# Altium PCB DriverPrototype.PcbDoc
Units mm, origin at the board's own origin, x right, y up, seen from the top; angles counter-clockwise.
Board outline 84.45 x 37.46 mm, 2 copper layers (Top Layer, Bottom Layer); 25 components, 24 nets, 69 pads, 310 vias.
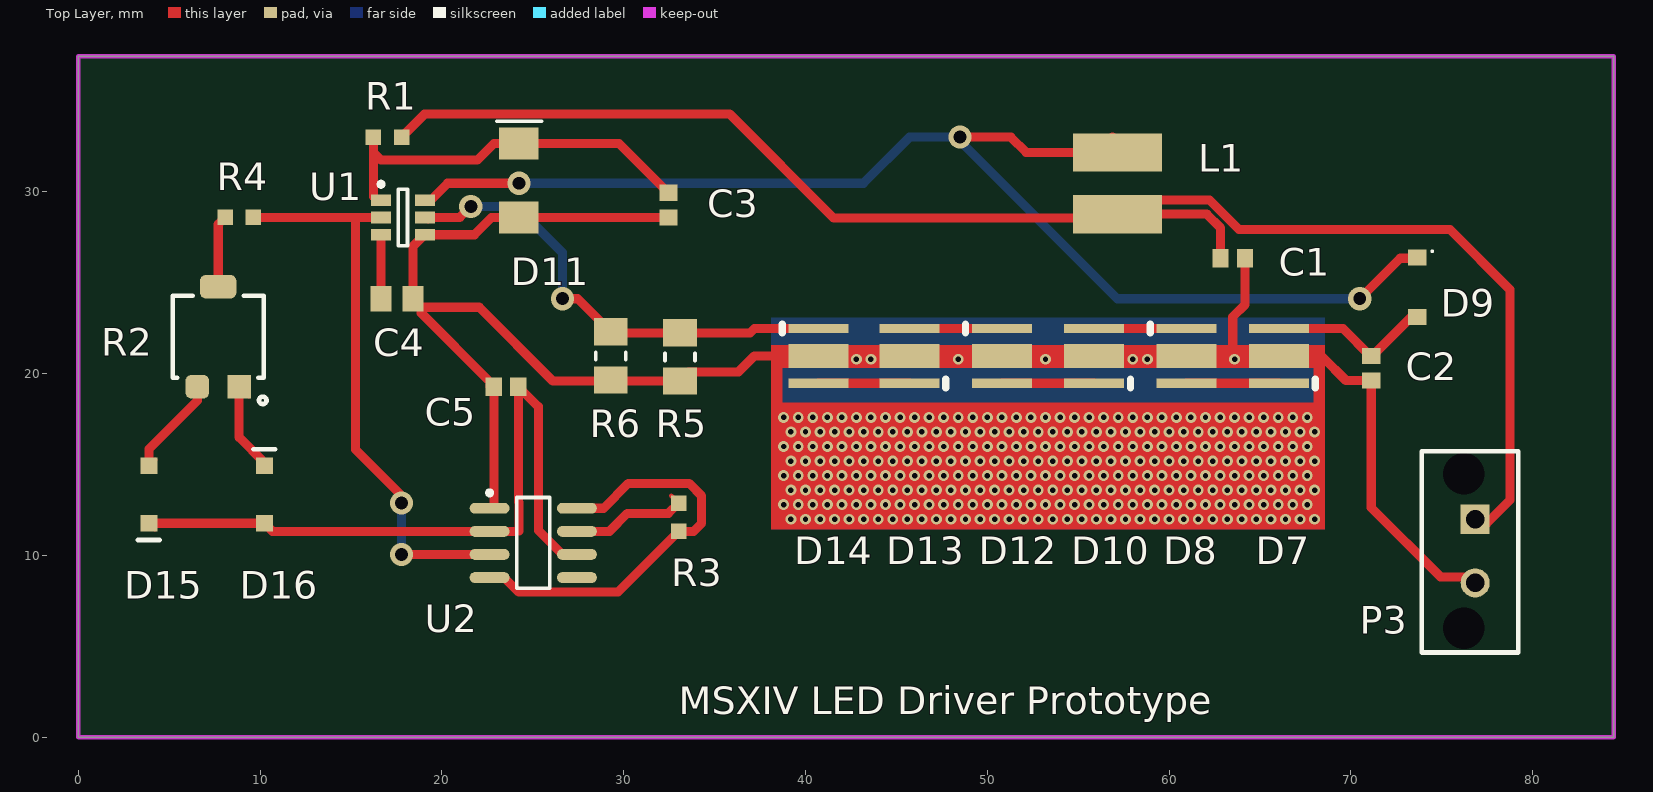
[diagram p0: Top Layer view]
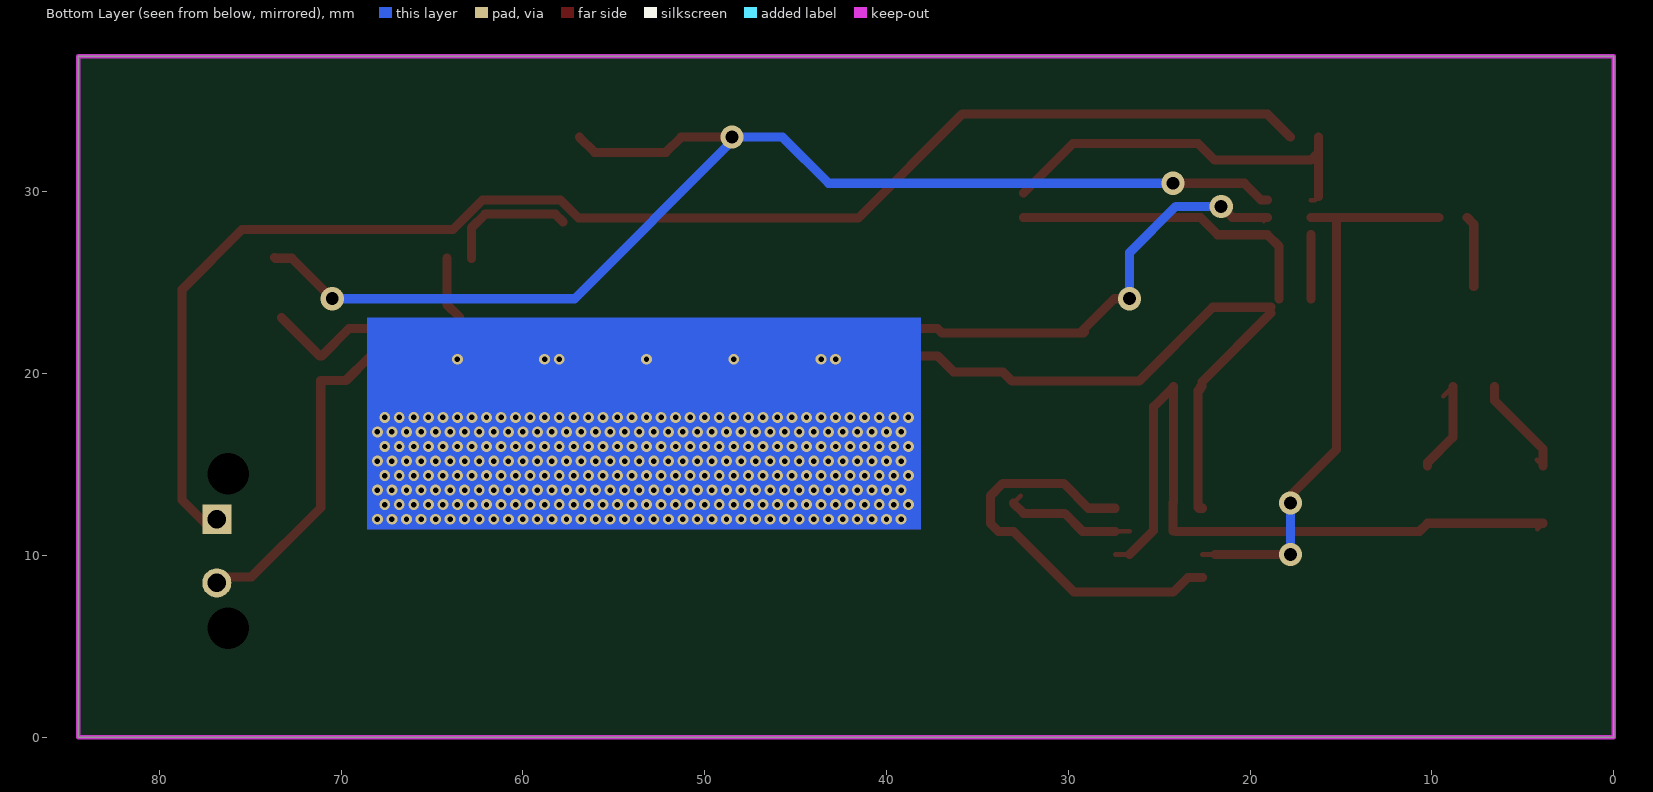
[diagram p1: Bottom Layer view, seen from below]
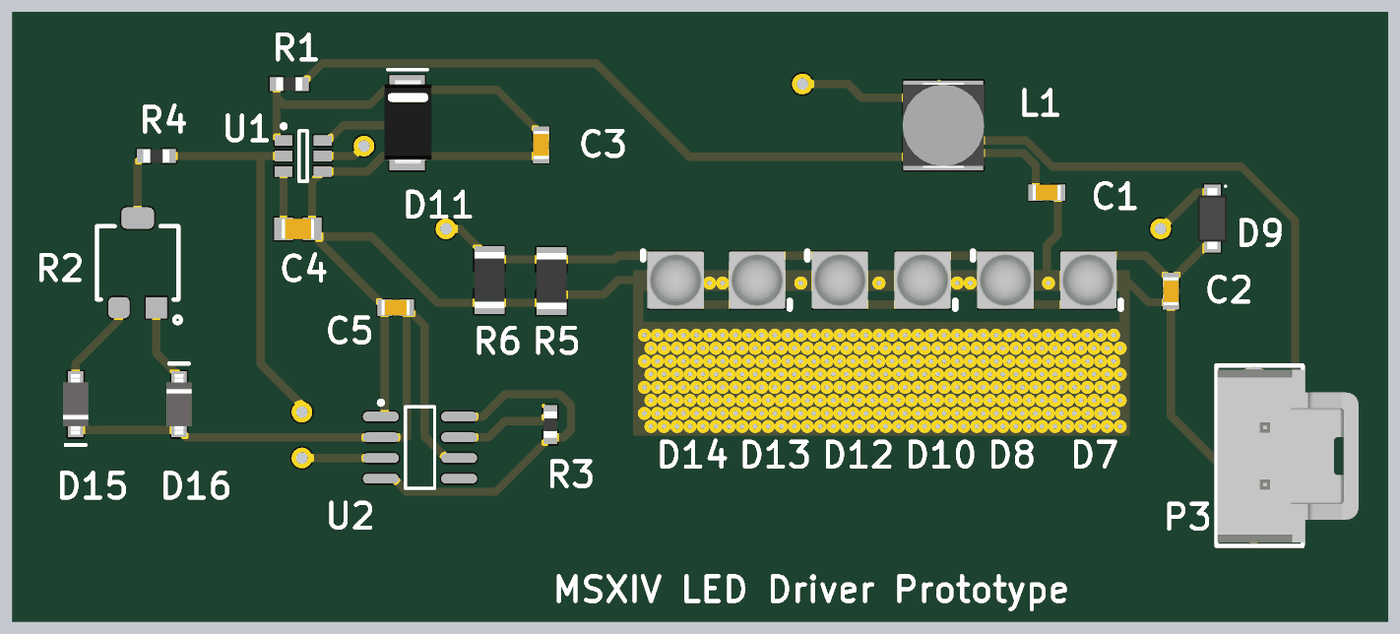
[diagram p2: 3D render of the assembled board from above, using the file's embedded part models]

## Layer stack, top to bottom
Top Solder: solder mask 0.0102, Solder Resist, Dk 3.5
Top Layer: signal copper 0.0356
Dielectric 1: dielectric 0.32, FR-4, Dk 4.8
Bottom Layer: signal copper 0.0356
Bottom Solder: solder mask 0.0102, Solder Resist, Dk 3.5

## Board outline
0,0 84.455,0 84.455,37.465 0,37.465

## Design rules (kind name [scope] priority, off if disabled: settings)
Clearance "Stitching GND" [IsStitchingVia and InNet('GND') vs (IsVia and (Not IsStitchingVia)) Or IsPad] p1: gap=0.1 ignorepadtopadclearanceinfootprint=FALSE
Clearance [All] p2: gap=0.254 ignorepadtopadclearanceinfootprint=FALSE except(0: Arc-Hole Track-Hole SMDPad-Hole THPad-Hole Via-Hole Fill-Hole Poly-Hole Region-Hole Text-Hole)
PolygonConnect [All] p1: connectstyle=Relief reliefconductorwidth=0.254 reliefentries=4 polygonreliefangle="90 Angle" airgapwidth=0.254
RoutingVias [InDrillLayerPair('Top Layer - Bottom Layer')] p1: holewidth=0.711 width=1.27 viastyle="Through Hole" minholewidth=0.711 minwidth=1.27 maxholewidth=0.711 maxwidth=1.27
SolderMaskExpansion [All] p1: expansion=0.102
Width [All] p1: maxlimit=0.5 minlimit=0.5 preferedwidth=0.5 minimp=50.000000 maximp=50.000000 favimp=50.000000
30 further rules are at their usual default settings.

## Components (designator, comment, footprint, x,y, rotation, side; value= is the part's Value field where it differs from the comment)
C1 "CAP CER 4.7UF 25V 10% X5R 0603" "CAP, 0603" 63.5,26.357 r0 top
C2 "CAP CER 1UF 50V 10% X7R 0603" "CAP, 0603" 71.12,20.305 r270 top
C3 "CAP CER 1UF 50V 10% X7R 0603" "CAP, 0603" 32.458,29.275 r270 top
C4 "CAP CER 0.22UF 50V X7R 0805" "CAP, 0805" 17.533,24.13 r0 top
C5 "CAP CER 0.1UF 50V 10% X7R 0603" "CAP, 0603" 23.533,19.29 r0 top
D7 "LED XLAMP COOL WHITE 5700K 2SMD" "LED CREE XP-E2 1414 2-SMD" 66.04,20.98 r270 top
D8 "LED XLAMP COOL WHITE 5700K 2SMD" "LED CREE XP-E2 1414 2-SMD" 60.96,20.98 r90 top
D9 "DIODE SCHOTTKY 40V 500MA SOD123" SOD123 73.66,24.765 r270 top
D10 "LED XLAMP COOL WHITE 5700K 2SMD" "LED CREE XP-E2 1414 2-SMD" 55.88,20.98 r270 top
D11 "DIODE ZENER 16V 5W DO-214AA (SMB)" "DO-214AA Diode" 24.23,28.6 r90 top
D12 "LED XLAMP COOL WHITE 5700K 2SMD" "LED CREE XP-E2 1414 2-SMD" 50.8,20.98 r90 top
D13 "LED XLAMP COOL WHITE 5700K 2SMD" "LED CREE XP-E2 1414 2-SMD" 45.72,20.98 r270 top
D14 "LED XLAMP COOL WHITE 5700K 2SMD" "LED CREE XP-E2 1414 2-SMD" 40.718,20.98 r90 top
D15 "DIODE GEN PURP 100V 300MA SOD123" "DIODE GEN PURP 100V 300MA SOD123" 3.888,13.36 r90 top
D16 "DIODE GEN PURP 100V 300MA SOD123" "DIODE GEN PURP 100V 300MA SOD123" 10.238,13.36 r270 top
L1 "FIXED IND 10UH 1.13A 237 MOHM" INDP5050X20N 57.15,30.48 r90 top
P3 "CONN 2POS ULTRA-FIT 0.138\"" "CONN, 2POS ULTRA-FIT" 76.835,12 r270 top
R1 "1K" "RES, 0603" 17.005,33.02 r180 top
R2 "POT 20k OHM 20% 1/4W" "20K POT" 7.698,24.79 r270 top value=20K
R3 "1K" "RES, 0603" 33.02,12.108 r90 top
R4 "RES 100 OHM 1% 1/10W 0603" "RES, 0603" 8.848,28.6 r0 top
R5 "RES SMD 1.15 OHM 1% 1/4W 1206" "RES 1206" 33.098,20.925 r270 top
R6 "RES SMD 1.15 OHM 1% 1/4W 1206" "RES 1206" 29.288,20.98 r270 top
U1 "IC LED DRIVER RGLTR DIM SOT23-6" SOT23-6_N 17.858,28.6 r0 top
U2 "IC OSC SGL TIMER 2.1MHZ 8-SOIC" SOIC8 25.02,10.668 r0 top

## Footprints (in the part's own frame and the unit in brackets; to place one, negate y for a bottom-side part, rotate by r counter-clockwise, add the part's x,y. Pads: shape width x height; smd on the part's side, far side on the other; paste and mask are expansions set on the pad)
"20K POT" [mm]
  rect 1.3x1.3 smd: 1(5.5,1.15)
  rrect50% 1.3x2 smd: 2(0,0)
  rrect50% 1.3x1.3 smd: 3(5.5,-1.15)
  silkscreen extent 0.5,-2.5 6.46,2.66
"CAP, 0603" [mm] "Chip Capacitor, 2-Leads, Body 1.60x0.81mm, IPC Medium Density"
  rect 0.9x1 smd mask+0.076: 1(-0.675,0) 2(0.675,0)
  body extent -0.87,-0.48 0.87,0.48, height 0.9
"CAP, 0805" [mm] "Chip Capacitor, 2-Leads, Body 2.00x1.25mm, IPC Medium Density"
  rect 1.15x1.4 smd: 1(-0.875,0) 2(0.875,0)
  body extent -1,-0.63 1,0.63, height 1.25
"CONN, 2POS ULTRA-FIT" [mm] "2 Positions Header, Shrouded Connector 0.138\" (3.50mm) Through Hole Gold"
  rect 1.6x1.6 hole 1.02: 1(0,0)
  round 1.6 hole 1.02: 2(3.5,0)
  round 1.6 hole 2.3: ""(-2.5,-0.63) ""(6,-0.63)
  silkscreen extent -3.74,-2.93 7.33,2.37, body extent -3.48,-2.87 7.12,5.79, height 13.85
"DIODE GEN PURP 100V 300MA SOD123" [mm] "Diode Standard 100V 300mA (DC) Surface Mount SOD-123"
  rect 0.9x0.95 smd: 1(1.58,0) 2(-1.58,0)
  silkscreen extent -2.5,-0.6 -2.5,0.6, body extent -1.85,-0.77 1.85,0.78, height 1.23
"DO-214AA Diode" [mil] "Zener Diode 16V 5W SMBJ5353B-TP"
  rect 70x85 smd: 1(0,0) 2(160,0)
  silkscreen extent 209,-50 209,47, body extent -21,-60 187,55, height 95
INDP5050X20N [mm] "Precision Wire Wound Inductor, 2-Leads, Body 5.00x5.00mm, IPC Medium Density"
  rect 2.1x4.9 smd: 1(-1.7,0) 2(1.7,0)
  body extent -2.6,-2.5 2.6,2.5, height 2.1
"LED CREE XP-E2 1414 2-SMD" [mm]
  rect 0.5x3.3 smd: 1(-1.5,0) 3(1.5,0)
  rect 1.3x3.3 smd: 2(0,0)
  silkscreen extent 1.27,2 1.75,2, body extent -1.73,-1.73 1.73,1.73, height 2.28
"RES 1206" [mm] "Chip Resistor, 2-Leads, Body 3.20x1.60mm, IPC Medium Density"
  rect 1.5x1.85 smd: 1(-1.325,0) 2(1.325,0)
  silkscreen extent -0.2,-0.82 0.2,0.82, body extent -1.73,-0.92 1.73,0.92, height 0.64
"RES, 0603" [mm] "Chip Resistor, 2-Leads, Body 1.60x0.80mm, IPC Medium Density"
  rect 0.85x0.85 smd: 1(-0.775,0) 2(0.775,0)
  body extent -0.8,-0.4 0.8,0.4, height 0.55
SOD123 [mm] "SODFL, 2-Leads, Body 1.60x3.75mm, IPC Medium Density"
  rect 0.88x1.02 smd: 1(-1.635,0) 2(1.635,0)
  silkscreen extent -2.02,0.76 -1.93,0.86, body extent -1.88,-0.9 1.88,0.9, height 1.28
SOIC8 [mm]
  oval 2.2x0.6 smd: 1(-2.394,1.935) 2(-2.394,0.665) 3(-2.394,-0.605) 4(-2.394,-1.875) 5(2.406,-1.875) 6(2.406,-0.605) 7(2.406,0.665) 8(2.406,1.935)
  silkscreen extent -2.52,-2.47 0.91,2.91, body extent -1.99,-2.47 2.01,2.53, height 1.75
SOT23-6_N [mm] "SOT23, 6-Leads, Body 2.9x1.6mm, Pitch 0.95mm, Lead Span 2.7mm, IPC Medium Density"
  rect 1.1x0.65 smd: 1(-1.2,0.95) 2(-1.2,0) 3(-1.2,-0.95) 4(1.2,-0.95) 5(1.2,0) 6(1.2,0.95)
  silkscreen extent -1.32,-1.55 0.25,1.95, body extent -0.9,-1.55 0.9,1.55, height 1.45

## Part data
C1: "4.7µF ?0% 25V Ceramic Capacitor X5R 0603 (1608 Metric)", Capacitance=4.7µF, Manufacturer 1="Murata Electronics North America", Manufacturer Part Number 1=GRM188R61E475KE11D, Operating Temperature="-55°C ~ 85°C", Package / Case="0603 (1608 Metric)", Ratings=-, Supplier Part Number 1=490-7203-1-ND, Temperature Coefficient=X5R, Tolerance=?0%, Voltage=25V, ComponentLink1Description=http://www.murata.com/~/media/webrenewal/support/library/catalog/products/capacitor/mlcc/c02e.ashx, ComponentLink1URL=http://www.murata.com/~/media/webrenewal/support/library/catalog/products/capacitor/mlcc/c02e.ashx, Height - Seated (Max)=-, Lead Spacing=-, Lead Style=-, Mounting Type="Surface Mount, MLCC", Packaging="Cut Tape (CT)", Part Status=Active, Size / Dimension="0.063\" L x 0.031\" W (1.60mm x 0.80mm)", Supplier 1=Digi-Key, Thickness (Max)="0.031\" (0.80mm)"
C2 C3: "1µF ?0% 50V Ceramic Capacitor X7R 0603 (1608 Metric)", Capacitance=1µF, Manufacturer 1="Taiyo Yuden", Manufacturer Part Number 1=UMK107AB7105KA-T, Operating Temperature="-55°C ~ 125°C", Package / Case="0603 (1608 Metric)", Ratings=-, Supplier Part Number 1=587-3247-1-ND, Temperature Coefficient=X7R, Tolerance=?0%, Voltage=50V, ComponentLink1Description=http://www.yuden.co.jp/productdata/catalog/en/mlcc_all_e.pdf, ComponentLink1URL=http://www.yuden.co.jp/productdata/catalog/en/mlcc_all_e.pdf, Height - Seated (Max)=-, Lead Spacing=-, Lead Style=-, Mounting Type="Surface Mount, MLCC", Packaging="Cut Tape (CT)", Part Status=Active, Size / Dimension="0.063\" L x 0.031\" W (1.60mm x 0.80mm)", Supplier 1=Digi-Key, Thickness (Max)="0.037\" (0.95mm)"
C4: Capacitance=220nF, Case/Package=0805, Case Code (Metric)=2012, Dielectric=X7R, Manufacturer=Samsung, Manufacturer Part Number=CL21B224KBFNNNE, Max Operating Temperature=125°C, Min Operating Temperature=-55°C, Package Quantity=1, Supplier Part Number 1=1276-1093-6-ND, Tolerance=10%, Voltage=50V, Case Code (Imperial)=0805, ComponentLink1Description=https://www.verical.com/server-webapp/html/getDatasheet?partID=358363&src-supplier=Verical, ComponentLink1URL=https://www.verical.com/server-webapp/html/getDatasheet?partID=358363&src-supplier=Verical, Contact Plating=Tin, Depth=1.25mm, Height=1.25mm, Lead Free="Lead Free", Length=2mm, Mount="Surface Mount", Packaging="Tape and Reel", Pricing 1="1=0.11, 10=0.077, 100=0.0361, 500=0.02532, 1000=0.02096 (USD)", Radiation Hardening=No, Stock 1=219478, Supplier 1=Digi-Key, Thickness=0.053inch, Voltage Rating=50V, Voltage Rating (DC)=50V, Width=0.049inch
C5: "0.10µF ?0% 50V Ceramic Capacitor X7R 0603 (1608 Metric)", Capacitance=0.1µF, Manufacturer 1="AVX Corporation", Manufacturer Part Number 1=06035C104KAT2A, Operating Temperature="-55°C ~ 125°C", Package / Case="0603 (1608 Metric)", Ratings=-, Supplier Part Number 1=478-5052-1-ND, Temperature Coefficient=X7R, Tolerance=?0%, Voltage=50V, ComponentLink1Description=http://datasheets.avx.com/X7RDielectric.pdf, ComponentLink1URL=http://datasheets.avx.com/X7RDielectric.pdf, Height - Seated (Max)=-, Lead Spacing=-, Lead Style=-, Mounting Type="Surface Mount, MLCC", Packaging="Cut Tape (CT)", Part Status=Active, Size / Dimension="0.063\" L x 0.032\" W (1.60mm x 0.81mm)", Supplier 1=Digi-Key, Thickness (Max)="0.035\" (0.90mm)"
D7 D8 D10 D13 D14: "LED Lighting XLamp?XP-E2 White, Cool 5700K 2.9V 350mA 110?1414 (3535 Metric)", Case/Package=SMD/SMT, Color=White, Correlated Color Temperature (CCT)=5700K, Forward Voltage=2.8V, Manufacturer=Cree, Manufacturer Part Number=XPGBWT-L1-0000-00JE2, Max Current Rating=1.5A, Supplier Part Number 1=XPGBWT-L1-0000-00JE2CT-ND, Test Current=350mA, Thermal Resistance of Package=4°C/W, ComponentLink1Description=http://www.mouser.com/ds/2/90/XLampXPE2-253473.pdf?src-supplier=Mouser, ComponentLink1URL=http://www.mouser.com/ds/2/90/XLampXPE2-253473.pdf?src-supplier=Mouser, ComponentLink2Description=http://www.cree.com/~/media/Files/Cree/LED%20Components%20and%20Modules/XLamp/Data%20and%20Binning/XLampXPE2.pdf?src-supplier=Digi-Key, ComponentLink2URL=http://www.cree.com/~/media/Files/Cree/LED%20Components%20and%20Modules/XLamp/Data%20and%20Binning/XLampXPE2.pdf?src-supplier=Digi-Key, ComponentLink3Description=https://www.verical.com/server-webapp/html/getDatasheet?partID=702662&src-supplier=Verical, ComponentLink3URL=https://www.verical.com/server-webapp/html/getDatasheet?partID=702662&src-supplier=Verical, Lead Free="Lead Free", Length=3.45mm, Mount="Surface Mount", Packaging="Tape and Reel", Pricing 1="1 = 1.47000, 10 = 1.40100, 100 = 1.25340, 250 = 1.13988, 500 = 1.06762 (USD)", RoHS=Yes, Stock 1=6024, Supplier 1=Digi-Key, Viewing Angle=115°, Width=3.45mm
D9: "Diode Schottky 40V 500mA Surface Mount SOD-123", Average Rectified Current=500mA, Current Rating=500A, Forward Voltage=620mV, Manufacturer="ON Semiconductor / Fairchild", Manufacturer Part Number=MBR0540, Max Forward Surge Current (Ifsm)=5.5A, Max Operating Temperature=125°C, Max Repetitive Reverse Voltage (Vrrm)=40V, Max Reverse Leakage Current=20uA, Min Operating Temperature=-65°C, Package Quantity=3000, Power Dissipation=400mW, Supplier Part Number 1=MBR0540DKR-ND, ComponentLink1Description=datasheet, ComponentLink1URL=https://www.onsemi.cn/PowerSolutions/document/MBR0540-D.pdf, ComponentLink2Description="supplier link", ComponentLink2URL=https://www.onsemi.com/PowerSolutions/product.do?id=MBR0540, ComponentLink3Description=https://www.fairchildsemi.com/datasheets/MB/MBR0540.pdf?src-supplier=Digi-Key, ComponentLink3URL=https://www.fairchildsemi.com/datasheets/MB/MBR0540.pdf?src-supplier=Digi-Key, ComponentLink4Description=https://www.onsemi.cn/PowerSolutions/document/MBR0540-D.pdf?src-supplier=Digi-Key, ComponentLink4URL=https://www.onsemi.cn/PowerSolutions/document/MBR0540-D.pdf?src-supplier=Digi-Key, ComponentLink5Description=http://www.jameco.com/Jameco/Products/ProdDS/975060.pdf?src-supplier=Jameco, ComponentLink5URL=http://www.jameco.com/Jameco/Products/ProdDS/975060.pdf?src-supplier=Jameco, ComponentLink6Description=http://www.mouser.com/ds/2/149/MBR0540-90522.pdf?src-supplier=Mouser, ComponentLink6URL=http://www.mouser.com/ds/2/149/MBR0540-90522.pdf?src-supplier=Mouser, ComponentLink7Description=https://www.verical.com/server-webapp/html/getDatasheet?partID=110131&src-supplier=Verical, ComponentLink7URL=https://www.verical.com/server-webapp/html/getDatasheet?partID=110131&src-supplier=Verical, ComponentLink8Description=http://www.farnell.com/datasheets/2041480.pdf?src-supplier=Element14, ComponentLink8URL=http://www.farnell.com/datasheets/2041480.pdf?src-supplier=Element14, ComponentLink9Description=https://www.fairchildsemi.com/datasheets/MB/MBR0540.pdf?src-supplier=Avnet, ComponentLink9URL=https://www.fairchildsemi.com/datasheets/MB/MBR0540.pdf?src-supplier=Avnet, Contact Plating=Tin,Matte, Element Configuration=Single, Forward Current=500mA, Height=1.03mm, Lead Free="Lead Free", Length=2.7mm, Max Reverse Voltage (DC)=40V, Max Surge Current=5.5A, Mount="Surface Mount", Number of Pins=2, Output Current=500mA, Packaging="Tape and Reel", Peak Non-Repetitive Surge Current=5.5A, Peak Reverse Current=20uA, Polarity=Standard, Pricing 1="1=0.2, 10=0.166, 100=0.0881, 500=0.05794, 1000=0.0394 (USD)", Radiation Hardening=No, REACH SVHC="No SVHC", Stock 1=414620, Supplier 1=Digi-Key, Voltage Rating (DC)=40V, Weight=0.03g, Width=1.6mm
D11: "Zener Diode 16V 5W ?% Surface Mount DO-214AA (SMB)", Manufacture="Micro Commercial Co", Manufacture Part Number=SMBJ5353B-TP, Power (Max)=5W, Supplier Part Number 1=SMBJ5353B-TPMSCT-ND, Voltage - Forward="1.2V @ 1A", Voltage - Zener (Nom)=16V, Impedence (Max)="2.5 Ohm", Supplier 1=Digi-Key
D12: "LED Lighting XLamp?XP-E2 White, Cool 5700K 2.9V 350mA 110?1414 (3535 Metric)", Case/Package=SMD/SMT, Color=White, Correlated Color Temperature (CCT)=5700K, Forward Voltage=2.9V, Manufacturer=Cree, Manufacturer Part Number=XPGBWT-L1-0000-00JE2, Max Current Rating=1.5A, Supplier Part Number 1=XPGBWT-L1-0000-00JE2CT-ND, Test Current=350mA, Thermal Resistance of Package=4°C/W, ComponentLink1Description=http://www.mouser.com/ds/2/90/XLampXPE2-253473.pdf?src-supplier=Mouser, ComponentLink1URL=http://www.mouser.com/ds/2/90/XLampXPE2-253473.pdf?src-supplier=Mouser, ComponentLink2Description=http://www.cree.com/~/media/Files/Cree/LED%20Components%20and%20Modules/XLamp/Data%20and%20Binning/XLampXPE2.pdf?src-supplier=Digi-Key, ComponentLink2URL=http://www.cree.com/~/media/Files/Cree/LED%20Components%20and%20Modules/XLamp/Data%20and%20Binning/XLampXPE2.pdf?src-supplier=Digi-Key, ComponentLink3Description=https://www.verical.com/server-webapp/html/getDatasheet?partID=702662&src-supplier=Verical, ComponentLink3URL=https://www.verical.com/server-webapp/html/getDatasheet?partID=702662&src-supplier=Verical, Lead Free="Lead Free", Length=3.45mm, Mount="Surface Mount", Packaging="Tape and Reel", Pricing 1="1 = 1.47000, 10 = 1.40100, 100 = 1.25340, 250 = 1.13988, 500 = 1.06762 (USD)", RoHS=Yes, Stock 1=6024, Supplier 1=Digi-Key, Viewing Angle=115°, Width=3.45mm
D15 D16: "Diode Standard 100V 300mA (DC) Surface Mount SOD-123", Case/Package=SOD-123-2, Forward Current=300mA, Forward Voltage=1.25V, Manufacturer="Diodes Zetex", Manufacturer Part Number=1N4148WQ-7-F, Max Operating Temperature=150°C, Max Power Dissipation=400mW, Max Repetitive Reverse Voltage (Vrrm)=100V, Max Surge Current=2A, Min Operating Temperature=-65°C, Package Quantity=3000, Peak Reverse Current=50uA, Supplier Part Number 1=1N4148WQ-7-FDICT-ND, ComponentLink1Description=http://components.arrow.com/part/dataview/0323_07206809, ComponentLink1URL=http://components.arrow.com/part/dataview/0323_07206809, ComponentLink2Description=http://www.diodes.com/datasheets/ds30086.pdf, ComponentLink2URL=http://www.diodes.com/datasheets/ds30086.pdf, ComponentLink3Description=http://www.mouser.com/ds/2/115/ds30086-318161.pdf, ComponentLink3URL=http://www.mouser.com/ds/2/115/ds30086-318161.pdf, Contact Plating=Tin,Matte, Element Configuration=Single, Lead Free="Lead Free", Mount="Surface Mount", Number of Pins=2, Packaging="Tape and Reel", Peak Non-Repetitive Surge Current=2A, Pricing 1="1=0.22, 10=0.196, 100=0.107, 500=0.0658, 1000=0.0449 (USD)", Recovery Time=4ns, Reverse Recovery Time=4ns, Stock 1=229, Supplier 1=Digi-Key, Weight=0.000353oz
L1: "10µH Shielded Wirewound Inductor 1.13A 237mOhm Max Nonstandard", Case/Package=2020, Current Rating=1.13A, DC Resistance (DCR)=237mR, Inductance=10uH, Inductance Tolerance=20%, Manufacturer=TDK, Manufacturer Part Number=VLCF5020T-100M1R1-1, Max Operating Temperature=105°C, Min Operating Temperature=-40°C, Package Quantity=500, RMS Current (Irms)=1.5A, Supplier Part Number 1=445-3209-2-ND, Test Frequency=100kHz, ComponentLink1Description=http://www.onlinecomponents.com/productFiles/mf-TDK/e531_vlcf5020_1.pdf?src-supplier=Onlinecomponents.com, ComponentLink1URL=http://www.onlinecomponents.com/productFiles/mf-TDK/e531_vlcf5020_1.pdf?src-supplier=Onlinecomponents.com, ComponentLink2Description=http://www.mouser.com/ds/2/400/e531_vlcf-18500.pdf?src-supplier=Mouser, ComponentLink2URL=http://www.mouser.com/ds/2/400/e531_vlcf-18500.pdf?src-supplier=Mouser, ComponentLink3Description=http://www.farnell.com/datasheets/516785.pdf?src-supplier=Element14, ComponentLink3URL=http://www.farnell.com/datasheets/516785.pdf?src-supplier=Element14, ComponentLink4Description=http://uk.rs-online.com/webdocs/1538/0900766b81538dbe.pdf?src-supplier=RSComponents, ComponentLink4URL=http://uk.rs-online.com/webdocs/1538/0900766b81538dbe.pdf?src-supplier=RSComponents, ComponentLink5Description=https://www.verical.com/server-webapp/html/getDatasheet?partID=107508&src-supplier=Verical, ComponentLink5URL=https://www.verical.com/server-webapp/html/getDatasheet?partID=107508&src-supplier=Verical, Composition=Wirewound, Core Material=Ferrite, DC Current=1.13A, Depth=5.2mm, Height=2mm, Height - Seated (Max)=0.079inch, Lead Free="Lead Free", Length=0.197inch, Max DC Current=1.13A, Military Standard=Not, Mount="Surface Mount", Number of Pins=2, Packaging="Tape and Reel", Pricing 1="500=0.441, 1000=0.357, 2500=0.336, 5000=0.3255, 12500=0.315, 25000=0.3045 (USD)", Radiation Hardening=No, REACH SVHC="No SVHC", Saturation Current=1.13A, Shielding=Shielded, Stock 1=12500, Supplier 1=Digi-Key, Termination=SMD/SMT, Tolerance=20%, Width=0.197inch
P3: "Connector Header Through Hole 2 position 0.138\" (3.50mm)", Color=Black, Manufacturer=Molex, Manufacturer Part Number=1722871102, Supplier Part Number 1=WM11701-ND, ComponentLink1Description=http://www.molex.com/pdm_docs/sd/1722861302_sd.pdf, ComponentLink1URL=http://www.molex.com/pdm_docs/sd/1722861302_sd.pdf, Connector Type="Male Pin", Contact Plating=Tin, Fastening Type=Latch, Mount="Through Hole", Number of Positions=2, Number of Rows=1, Packaging=Tray, Pitch=0.138inch, Pricing 1="1 = 0.78000, 10 = 0.68800, 100 = 0.59380, 500 = 0.48582, 1000 = 0.43184, 5000 = 0.37786, 10000 = 0.35897 (USD)", RoHS=Yes, Series=UltraFit, Stock 1=2743, Supplier 1=Digi-Key, Termination=Solder
R1 R3: library part "RES 1K OHM 5% 1/10W 0603", "1k Ohm ?% 0.1W, 1/10W Chip Resistor 0603 (1608 Metric)", Manufacturer=Yageo, Manufacturer Part Number=RC0603JR-071KL, Operating Temperature="-55°C ~ 155°C", Package / Case="0603 (1608 Metric)", Power (Watts)="0.1W, 1/10W", Resistance (Ohms)=1k, Supplier Device Package=0603, Supplier Part Number 1=311-1.0KGRCT-ND, Temperature Coefficient=?00ppm/°C, Tolerance=?%, Category=Resistors, ComponentLink1Description=http://www.yageo.com/documents/recent/PYu-RC_Group_51_RoHS_L_7.pdf, ComponentLink1URL=http://www.yageo.com/documents/recent/PYu-RC_Group_51_RoHS_L_7.pdf, Composition="Thick Film", Failure Rate=-, Features="Moisture Resistant", Height - Seated (Max)="0.022\" (0.55mm)", Packaging="Cut Tape (CT)", Part Status=Active, Pricing 1="1=0.15, 10=0.017, 100=0.0071, 1000=0.0032, 2500=0.00278 (CAD)", RoHS="RoHS Compliant", Size / Dimension="0.063\" L x 0.031\" W (1.60mm x 0.80mm)", Stock 1=4415240, Supplier 1=Digi-Key
R2: "20k Ohm 0.25W, 1/4W Gull Wing Surface Mount Trimmer Potentiometer", Manufacture="TT Electronics/BI", Manufacture Part Number=23BR20KLFTR, Power=1/4W, Supplier Part Number 1=987-1016-1-ND, Tolerence=20%, Adjustment Type=Top, Supplier 1=Digi-Key, Turns=1
R4: "100 Ohm ?% 0.1W, 1/10W Chip Resistor 0603 (1608 Metric) Moisture Resistant Thick Film", Manufacturer 1=Yageo, Manufacturer Part Number 1=RC0603FR-07100RL, Operating Temperature="-55°C ~ 155°C", Package / Case="0603 (1608 Metric)", Power=1/10W, Resistance=100, Supplier Device Package=0603, Supplier Part Number 1=311-100HRCT-ND, Temperature Coefficient=?00ppm/°C, Tolerance=?%, ComponentLink1Description=http://www.yageo.com/documents/recent/PYu-RC_Group_51_RoHS_L_7.pdf, ComponentLink1URL=http://www.yageo.com/documents/recent/PYu-RC_Group_51_RoHS_L_7.pdf, Composition="Thick Film", Failure Rate=-, Height - Seated (Max)="0.022\" (0.55mm)", Packaging="Cut Tape (CT)", Part Status=Active, Size / Dimension="0.063\" L x 0.031\" W (1.60mm x 0.80mm)", Supplier 1=Digi-Key
R5 R6: Case/Package=1206, Manufacturer=Yageo, Manufacturer Part Number=RC1206FR-071R15L, Max Operating Temperature=155°C, Min Operating Temperature=-55°C, Resistance=1.15R, Supplier Part Number 1=311-1.15FRDKR-ND, Temperature Coefficient=200ppm/°C, Tolerance=1%, Voltage Rating (DC)=200V, Composition="Thick Film", Contact Plating=Tin,Matte, Lead Free="Lead Free", Pricing 1="1=0.15, 10=0.133, 100=0.0512, 1000=0.02252, 2500=0.01945 (USD)", Radiation Hardening=No, Stock 1=34622, Supplier 1=Digi-Key
U1: "LED Driver IC 1 Output DC DC Regulator Step-Up (Boost) PWM Dimming 1.2A (Switch) SOT-23-6", Case/Package=SOT-23-6, Frequency=1.2MHz, Manufacturer="Texas Instruments", Manufacturer Part Number=TPS61165TDBVRQ1, Max Input Voltage=18V, Max Operating Temperature=105°C, Max Supply Current=2.3mA, Min Input Voltage=3V, Min Operating Temperature=-40°C, Output Current=1.2A, Output Voltage=38V, Package Quantity=3000, Quiescent Current=1.5mA, Supplier Part Number 1=TPS61165TDBVRQ1-ND, ComponentLink1Description=datasheet, ComponentLink1URL=http://www.ti.com/lit/ds/symlink/tps61165.pdf, ComponentLink2Description=http://www.ti.com/lit/gpn/tps61165-q1?src-supplier=Mouser, ComponentLink2URL=http://www.ti.com/lit/gpn/tps61165-q1?src-supplier=Mouser, ComponentLink3Description=https://www.verical.com/server-webapp/html/getDatasheet?partID=676299&src-supplier=Verical, ComponentLink3URL=https://www.verical.com/server-webapp/html/getDatasheet?partID=676299&src-supplier=Verical, ComponentLink4Description=http://www.ti.com/lit/ds/symlink/tps61165-q1.pdf?src-supplier=Digi-Key, ComponentLink4URL=http://www.ti.com/lit/ds/symlink/tps61165-q1.pdf?src-supplier=Digi-Key, Dimming=PWM, Lead Free="Lead Free", Max Supply Voltage=18V, Min Supply Voltage=3V, Number of Channels=1, Number of Outputs=1, Number of Pins=6, Number of Segments=3, Output Current per Channel=1.2A, Packaging="Tape and Reel", Radiation Hardening=No, Stock 1=0, Supplier 1=Digi-Key, Topology=Boost
U2: "555 Type, Timer/Oscillator (Single) IC 2.1MHz 8-SOIC", Case/Package=SOIC, Frequency=2.1MHz, High Level Output Current=-10mA, Low Level Output Current=100mA, Manufacturer="Texas Instruments", Manufacturer Part Number=TLC555QDRQ1, Max Operating Temperature=125°C, Max Power Dissipation=725mW, Max Supply Voltage=15V, Min Operating Temperature=-40°C, Min Supply Voltage=2V, Nominal Supply Current=170uA, Operating Supply Current=360uA, Package Quantity=2500, Supplier Part Number 1=296-22999-2-ND, ComponentLink1Description=http://focus.ti.com/lit/ds/symlink/tlc555-q1.pdf?src-supplier=Avnet, ComponentLink1URL=http://focus.ti.com/lit/ds/symlink/tlc555-q1.pdf?src-supplier=Avnet, ComponentLink2Description=http://www.farnell.com/datasheets/1806066.pdf?src-supplier=Element14, ComponentLink2URL=http://www.farnell.com/datasheets/1806066.pdf?src-supplier=Element14, ComponentLink3Description=https://www.verical.com/server-webapp/html/getDatasheet?partID=297376&src-supplier=Verical, ComponentLink3URL=https://www.verical.com/server-webapp/html/getDatasheet?partID=297376&src-supplier=Verical, ComponentLink4Description=http://www.ti.com/lit/ds/symlink/tlc555-q1.pdf?src-supplier=Digi-Key, ComponentLink4URL=http://www.ti.com/lit/ds/symlink/tlc555-q1.pdf?src-supplier=Digi-Key, Contact Plating=Gold, Lead Free="Lead Free", Mount="Surface Mount", Number of Pins=8, Number of Timers/Counters=1, Packaging="Tape and Reel", Power Dissipation=725mW, Pricing 1="2500=0.3528, 5000=0.33516, 12500=0.32256 (USD)", Quiescent Current=170uA, Radiation Hardening=No, REACH SVHC="No SVHC", Stock 1=60000, Supplier 1=Digi-Key, Weight=0.002561oz

## Via types
v1: diameter 0.6, hole 0.3, Top Layer to Bottom Layer, 303 vias
v2: diameter 1.27, hole 0.711, Top Layer to Bottom Layer, 7 vias

## Nets (pads, with @x,y where several pads share a name; then routed paths per layer and width w, separated by ;. In a path a pad name is that pad's centre, name@x,y a point inside that pad or via, vN(x,y) a via of type N, cw(c..) or ccw(c..) an arc to the next point about the centre after c; other vN are vias at no path point)
6V6: 
GND: C1.2 C2.2 C3.2 C4.2 C5.1 D7.2 D8.2 D10.2 D11.1 D12.2 D13.2 D14.2 P3.2 R5.2 R6.2 U1.4 U2.1 | length 106.1
  Top Layer w0.254: 18.856,23.342 C4.2@18.856,23.682 ; C5.1@22.626,19.059 22.758,19.19 C5.1 C5.1@22.858,19.34 ; R6.2 R6.2@29.343,19.6
  Top Layer w0.5: C4.2 18.408,27 U1.4 21.787,27.65 22.737,28.6 D11.1 C3.2 ; 18.856,23.342 22.658,19.54 22.658,19.29 22.758,19.19 22.858,19.09 22.858,12.649 22.811,12.603 U2.1 ; C4.2@18.856,23.682 18.88,23.658 22.056,23.658 26.113,19.6 29.343,19.6 R5.2 33.598,20.1 36.305,20.1 37.185,20.98 D14.2 D13.2 D12.2 D10.2 D8.2 v1@63.5,20.98 ; C1.2 64.175,23.805 63.5,23.13 v1@63.5,20.98 ; P3.2 76.51,8.825 74.93,8.825 71.12,12.635 C2.2 69.73,19.63 68.44,20.92 66.1,20.92 D7.2 v1@63.5,20.98
  other v1: 39.2,12 40,12 40.8,12 41.6,12 42.4,12 43.2,12 44,12 44.8,12 45.6,12 46.4,12 47.2,12 48,12 48.8,12 49.6,12 50.4,12 51.2,12 52,12 52.8,12 53.6,12 54.4,12 55.2,12 56,12 56.8,12 57.6,12 58.4,12 59.2,12 60,12 60.8,12 61.6,12 62.4,12 63.2,12 64,12 64.8,12 65.6,12 66.4,12 67.2,12 68,12 38.8,12.8 39.6,12.8 40.4,12.8 41.2,12.8 42,12.8 42.8,12.8 43.6,12.8 44.4,12.8 45.2,12.8 46,12.8 46.8,12.8 47.6,12.8 48.4,12.8 49.2,12.8 50,12.8 50.8,12.8 51.6,12.8 52.4,12.8 53.2,12.8 54,12.8 54.8,12.8 55.6,12.8 56.4,12.8 57.2,12.8 58,12.8 58.8,12.8 59.6,12.8 60.4,12.8 61.2,12.8 62,12.8 62.8,12.8 63.6,12.8 64.4,12.8 65.2,12.8 66,12.8 66.8,12.8 67.6,12.8 39.2,13.6 40,13.6 40.8,13.6 41.6,13.6 42.4,13.6 43.2,13.6 44,13.6 44.8,13.6 45.6,13.6 46.4,13.6 47.2,13.6 48,13.6 48.8,13.6 49.6,13.6 50.4,13.6 51.2,13.6 52,13.6 52.8,13.6 53.6,13.6 54.4,13.6 55.2,13.6 56,13.6 56.8,13.6 57.6,13.6 58.4,13.6 59.2,13.6 60,13.6 60.8,13.6 61.6,13.6 62.4,13.6 63.2,13.6 64,13.6 64.8,13.6 65.6,13.6 66.4,13.6 67.2,13.6 68,13.6 38.8,14.4 39.6,14.4 40.4,14.4 41.2,14.4 42,14.4 42.8,14.4 43.6,14.4 44.4,14.4 45.2,14.4 46,14.4 46.8,14.4 47.6,14.4 48.4,14.4 49.2,14.4 50,14.4 50.8,14.4 51.6,14.4 52.4,14.4 53.2,14.4 54,14.4 54.8,14.4 55.6,14.4 56.4,14.4 57.2,14.4 58,14.4 58.8,14.4 59.6,14.4 60.4,14.4 61.2,14.4 62,14.4 62.8,14.4 63.6,14.4 64.4,14.4 65.2,14.4 66,14.4 66.8,14.4 67.6,14.4 39.2,15.2 40,15.2 40.8,15.2 41.6,15.2 42.4,15.2 43.2,15.2 44,15.2 44.8,15.2 45.6,15.2 46.4,15.2 47.2,15.2 48,15.2 48.8,15.2 49.6,15.2 50.4,15.2 51.2,15.2 52,15.2 52.8,15.2 53.6,15.2 54.4,15.2 55.2,15.2 56,15.2 56.8,15.2 57.6,15.2 58.4,15.2 59.2,15.2 60,15.2 60.8,15.2 61.6,15.2 62.4,15.2 63.2,15.2 64,15.2 64.8,15.2 65.6,15.2 66.4,15.2 67.2,15.2 68,15.2 38.8,16 39.6,16 40.4,16 41.2,16 42,16 42.8,16 43.6,16 44.4,16 45.2,16 46,16 46.8,16 47.6,16 48.4,16 49.2,16 50,16 50.8,16 51.6,16 52.4,16 53.2,16 54,16 54.8,16 55.6,16 56.4,16 57.2,16 58,16 58.8,16 59.6,16 60.4,16 61.2,16 62,16 62.8,16 63.6,16 64.4,16 65.2,16 66,16 66.8,16 67.6,16 39.2,16.8 40,16.8 40.8,16.8 41.6,16.8 42.4,16.8 43.2,16.8 44,16.8 44.8,16.8 45.6,16.8 46.4,16.8 47.2,16.8 48,16.8 48.8,16.8 49.6,16.8 50.4,16.8 51.2,16.8 52,16.8 52.8,16.8 53.6,16.8 54.4,16.8 55.2,16.8 56,16.8 56.8,16.8 57.6,16.8 58.4,16.8 59.2,16.8 60,16.8 60.8,16.8 61.6,16.8 62.4,16.8 63.2,16.8 64,16.8 64.8,16.8 65.6,16.8 66.4,16.8 67.2,16.8 68,16.8 38.8,17.6 39.6,17.6 40.4,17.6 41.2,17.6 42,17.6 42.8,17.6 43.6,17.6 44.4,17.6 45.2,17.6 46,17.6 46.8,17.6 47.6,17.6 48.4,17.6 49.2,17.6 50,17.6 50.8,17.6 51.6,17.6 52.4,17.6 53.2,17.6 54,17.6 54.8,17.6 55.6,17.6 56.4,17.6 57.2,17.6 58,17.6 58.8,17.6 59.6,17.6 60.4,17.6 61.2,17.6 62,17.6 62.8,17.6 63.6,17.6 64.4,17.6 65.2,17.6 66,17.6 66.8,17.6 67.6,17.6 42.8,20.8 43.6,20.8 48.4,20.8 53.2,20.8 58,20.8 58.8,20.8 63.6,20.8
NetC2_1: C2.1 D7.1 D9.2 | length 8.7
  Top Layer w0.5: D7.1 69.57,22.48 71.07,20.98 C2.1 71.17,20.98 D9.2@73.277,23.087
NetC3_1: C3.1 D11.2 R1.2 U1.1 | length 21.7
  Top Layer w0.254: U1.1@16.235,29.748 16.433,29.55 U1.1
  Top Layer w0.5: R1.2 16.23,32.178 ; U1.1@16.235,29.748 16.23,29.753 16.23,32.178 ; C3.1 29.744,32.664 22.86,32.664 21.946,31.75 16.658,31.75 16.23,32.178
NetC4_1: C4.1 U1.3 | length 3.5
  Top Layer w0.5: C4.1 U1.3
NetC5_2: C5.2 D15.2 D16.1 U2.2 U2.6 | length 40
  Top Layer w0.254: D15.2 D15.2@4.211,11.457 ; U2.6@26.626,10.063 U2.6
  Top Layer w0.5: D15.2 D16.1 10.685,11.333 U2.2 24.081,11.333 24.107,11.359 24.23,11.359 24.23,12.936 24.208,12.959 C5.2 25.306,18.192 25.306,11.383 U2.6@26.626,10.063
NetD1_3: 
NetD2_3: 
NetD3_3: 
NetD4_3: 
NetD7_3: D7.3 D8.1 | length 5.1
  Top Layer w0.5: D8.1 D7.3
NetD8_3: D8.3 D10.1 | length 5.1
  Top Layer w0.5: D10.1 D8.3
NetD9_1: D9.1 L1.2 U1.6 | length 69.3
  Top Layer w0.5: U1.6 19.39,29.55 20.32,30.48 v2(24.23,30.48) ; v2(48.5,33.02) 51.298,33.02 52.138,32.18 56.053,32.18 L1.2@56.893,33.02 ; v2(70.485,24.13) 72.712,26.357 73.617,26.357 D9.1
  Bottom Layer w0.5: v2(24.23,30.48) 43.18,30.48 45.72,33.02 v2(48.5,33.02) 48.5,32.78 57.15,24.13 v2@69.85,24.13
NetD10_3: D10.3 D12.1 | length 5.1
  Top Layer w0.5: D12.1 D10.3
NetD12_3: D12.3 D13.1 | length 5.1
  Top Layer w0.5: D13.1 D12.3
NetD13_3: D13.3 D14.1 | length 5
  Top Layer w0.5: D14.1 D13.3
NetD14_3: D14.3 R5.1 R6.1 U1.5 | length 27
  Top Layer w0.254: U1.5 U1.5@19.256,28.402
  Top Layer w0.5: U1.5 20.98,28.6 v2(21.59,29.21) ; v2(26.626,24.13) 27.463,24.13 R6.1 29.113,22.305 29.168,22.25 R5.1 36.955,22.25 37.185,22.48 D14.3
  Bottom Layer w0.5: v2(21.59,29.21) 24.086,29.21 26.626,26.67 v2(26.626,24.13)
NetD15_1: D15.1 R2.3 | length 5.9
  Top Layer w0.254: D15.1 3.913,14.94 D15.1@4.236,15.263
  Top Layer w0.5: D15.1 3.888,15.86 6.548,18.52 R2.3
NetD16_2: D16.2 R2.1 | length 5.7
  Top Layer w0.254: R2.1 R2.1@9.371,18.767 ; D16.2@10.213,14.94 D16.2
  Top Layer w0.5: R2.1 8.848,16.51 10.238,15.12 D16.2
NetR2_2: R2.2 R4.1 | length 4.1
  Top Layer w0.254: R2.2 R2.2@7.775,24.867
  Top Layer w0.5: R2.2 7.698,28.225 R4.1
NetR3_2: R3.2 U2.7 | length 7.6
  Top Layer w0.254: U2.7@26.626,11.333 U2.7 ; R3.2@32.619,13.284 R3.2
  Top Layer w0.5: U2.7 29.218,11.333 30.206,12.321 32.458,12.321 R3.2
NetR4_2: R4.2 U1.2 U2.3 | length 31.1
  Top Layer w0.254: U2.3@21.92,10.063 U2.3
  Top Layer w0.5: R4.2 15.24,28.6 ; U1.2 15.24,28.6 ; v2@18.127,12.959 15.24,15.846 15.24,28.6 ; v2@18.224,10.063 U2.3@21.92,10.063
  Bottom Layer w0.5: v2(17.78,10.063) v2(17.78,12.883)
VBAT: C1.1 L1.1 P3.1 R1.1 | length 86.9
  Top Layer w0.5: R1.1 19.05,34.29 35.825,34.29 41.555,28.56 56.93,28.56 L1.1 57.92,29.55 62.23,29.55 63.84,27.94 75.438,27.94 78.74,24.638 78.74,13.05 P3.1@77.47,11.78 ; L1.1@57.785,28.35 58.215,28.78 62.07,28.78 62.825,28.025 C1.1
VDD: R3.1 U2.4 U2.8 | length 22.8
  Top Layer w0.5: U2.4 23.426,8.793 24.23,7.989 29.676,7.989 R3.1 33.843,11.333 34.29,11.78 34.29,13.278 33.598,13.97 30.258,13.97 28.891,12.603 U2.8
pads on no net: P3. U2.5

## Polygon pours and split planes (outlines as drawn)
no net on Top Layer "Top Layer-No Net" (solid, pour order 0): 38.1,20.32

## Keep-outs
Keep-Out Layer:
  the board outline again, w0.254

## Other copper
Top Layer:
  rectangle net GND: 38.1,11.43 68.58,18.415
  rectangle net GND: 67.945,13.97 68.58,21.59
  rectangle net GND: 38.1,13.97 38.735,21.59
  rectangle net GND: 38.1,20.32 68.44,21.59
Bottom Layer:
  rectangle net GND: 38.1,11.43 68.58,23.087

## Silkscreen, mask and mechanical layers (free items; w line width, h text height)
Top Overlay:
  text "MSXIV LED Driver Prototype" at 33.02,1.27 h1.52